# Altium PCB Copy of MB1189.PcbDoc (part 3 of 3)
Units mm, origin at the board's own origin, x right, y up, seen from the top; angles counter-clockwise.
Board outline 60.03 x 127.03 mm, 6 copper layers (TOP, L2_GND, L3_VCC, L4_SIG, L5_GND, BOTTOM), stack 1.58 mm thick; 10 components, 264 nets, 52 pads, 0 vias.
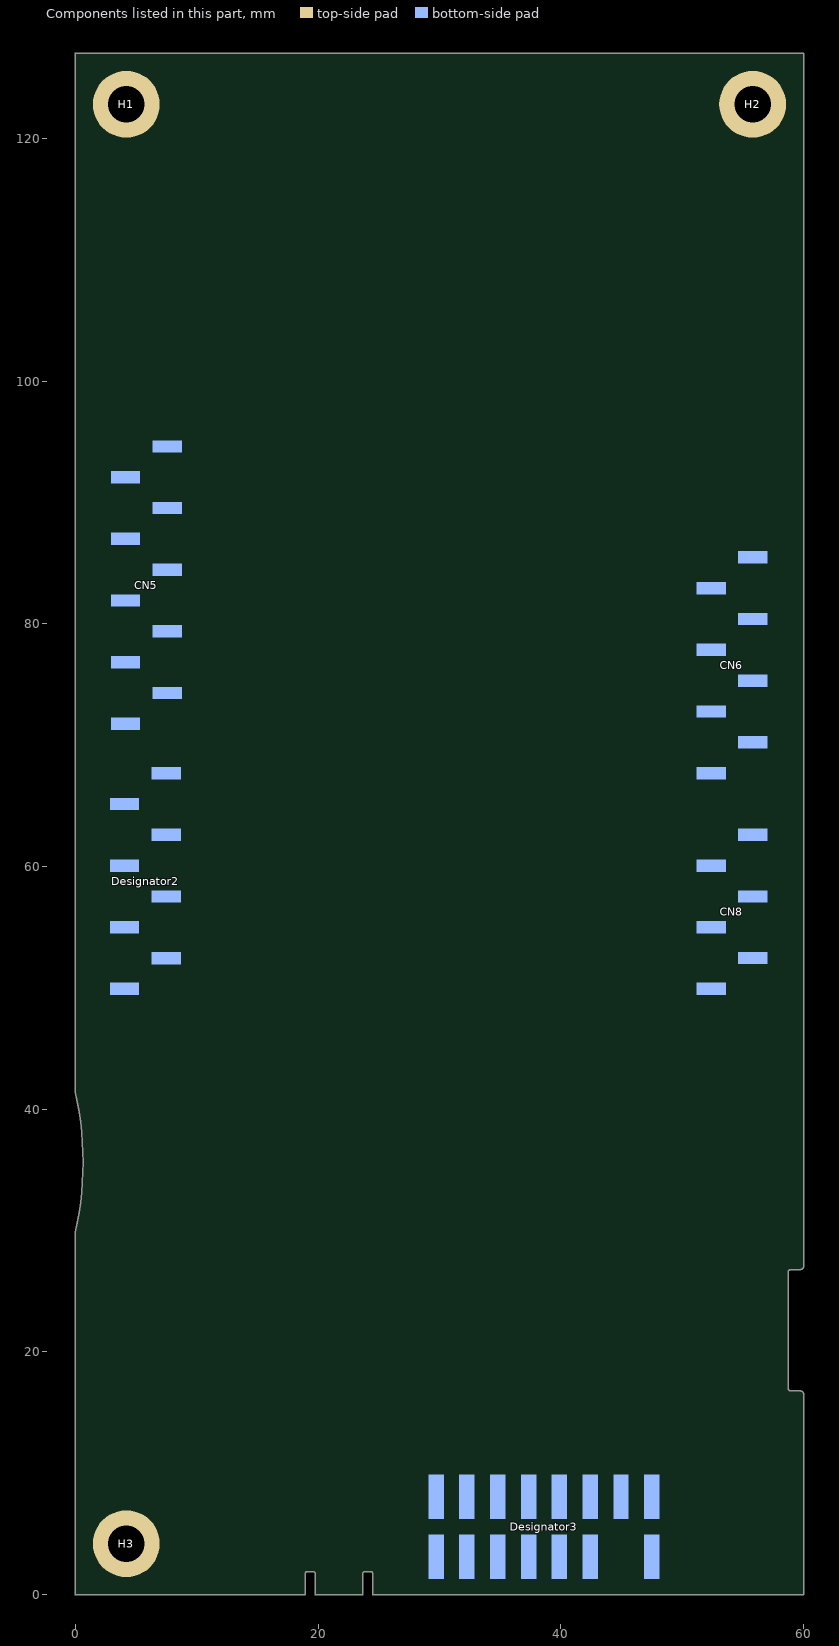
[diagram p7: the components of this part, seen from the top]

## Other copper (continued)
L3_VCC (plane layer: these items are gaps in the copper):
  region: 16.777,62.23 25.401,62.23 25.655,61.976 25.655,60.452 25.506,60.303 25.655,60.155 25.655,58.42 25.527,58.292 16.777,58.292 16.777,58.42 18.377,58.42 18.377,60.071 16.777,60.071 16.777,60.452 18.377,60.452 18.377,62.103 16.777,62.103
  region: 16.777,62.23 11.261,62.23 11.134,62.103 11.134,60.528 11.405,60.258 11.175,60.028 11.175,58.547 11.43,58.292 16.777,58.292
  pour cut-out: 10.015,38.792 9.989,38.984 9.915,39.164 9.797,39.318 9.643,39.436 9.463,39.51 9.271,39.536 9.079,39.51 8.899,39.436 8.745,39.318 8.627,39.164 8.553,38.984 8.527,38.792 8.553,38.599 8.627,38.42 8.745,38.266 8.899,38.148 9.079,38.074 9.271,38.048 9.463,38.074 9.643,38.148 9.797,38.266 9.915,38.42 9.989,38.599 10.015,38.792
  pour cut-out: 10.015,31.242 9.989,31.434 9.915,31.614 9.797,31.768 9.643,31.886 9.463,31.96 9.271,31.986 9.079,31.96 8.899,31.886 8.745,31.768 8.627,31.614 8.553,31.434 8.527,31.242 8.553,31.05 8.627,30.87 8.745,30.716 8.899,30.598 9.079,30.524 9.271,30.498 9.463,30.524 9.643,30.598 9.797,30.716 9.915,30.87 9.989,31.05 10.015,31.242
  pour cut-out: 13.346,102.108 13.298,102.468 13.159,102.804 12.938,103.093 12.649,103.314 12.313,103.453 11.953,103.501 11.593,103.453 11.257,103.314 10.968,103.093 10.747,102.804 10.608,102.468 10.56,102.108 10.608,101.748 10.747,101.412 10.968,101.123 11.257,100.902 11.593,100.763 11.953,100.715 12.313,100.763 12.649,100.902 12.938,101.123 13.159,101.412 13.298,101.748 13.346,102.108
  pour cut-out: 6.346,102.108 6.298,102.468 6.159,102.804 5.938,103.093 5.649,103.314 5.313,103.453 4.953,103.501 4.593,103.453 4.257,103.314 3.968,103.093 3.747,102.804 3.608,102.468 3.56,102.108 3.608,101.748 3.747,101.412 3.968,101.123 4.257,100.902 4.593,100.763 4.953,100.715 5.313,100.763 5.649,100.902 5.938,101.123 6.159,101.412 6.298,101.748 6.346,102.108
  pour cut-out: 8.629,21.59 8.595,21.851 8.494,22.095 8.334,22.304 8.125,22.464 7.881,22.565 7.62,22.599 7.359,22.565 7.115,22.464 6.906,22.304 6.746,22.095 6.645,21.851 6.611,21.59 6.645,21.329 6.746,21.085 6.906,20.876 7.115,20.716 7.359,20.615 7.62,20.581 7.881,20.615 8.125,20.716 8.334,20.876 8.494,21.085 8.595,21.329 8.629,21.59
  pour cut-out: 8.629,16.51 8.595,16.771 8.494,17.015 8.334,17.224 8.125,17.384 7.881,17.485 7.62,17.519 7.359,17.485 7.115,17.384 6.906,17.224 6.746,17.015 6.645,16.771 6.611,16.51 6.645,16.249 6.746,16.005 6.906,15.796 7.115,15.636 7.359,15.535 7.62,15.501 7.881,15.535 8.125,15.636 8.334,15.796 8.494,16.005 8.595,16.249 8.629,16.51
  pour cut-out: 30.027,122.151 29.996,122.386 29.905,122.605 29.76,122.793 29.572,122.938 29.353,123.028 29.118,123.059 28.883,123.028 28.664,122.938 28.476,122.793 28.331,122.605 28.241,122.386 28.21,122.151 28.241,121.916 28.331,121.697 28.476,121.509 28.664,121.364 28.883,121.273 29.118,121.242 29.353,121.273 29.572,121.364 29.76,121.509 29.905,121.697 29.996,121.916 30.027,122.151
  pour cut-out: 34.427,122.151 34.396,122.386 34.305,122.605 34.16,122.793 33.972,122.938 33.753,123.028 33.518,123.059 33.283,123.028 33.064,122.938 32.876,122.793 32.731,122.605 32.641,122.386 32.61,122.151 32.641,121.916 32.731,121.697 32.876,121.509 33.064,121.364 33.283,121.273 33.518,121.242 33.753,121.273 33.972,121.364 34.16,121.509 34.305,121.697 34.396,121.916 34.427,122.151
  lines w0.254: 9.134,4.804 9.134,16.786 ; 9.134,4.804 9.134,4.804 ; 9.134,4.804 9.162,4.735 9.174,4.707 ; 9.134,16.786 9.174,16.883 12.817,20.526 12.817,28.851 ; 9.134,16.786 9.134,16.786 ; 9.174,4.707 9.174,4.707 ; 9.174,4.707 9.533,4.348 9.63,4.308 ; 9.63,4.308 9.63,4.308 ; 9.63,4.308 13.484,4.308 13.581,4.348 ; 12.817,28.851 12.857,28.948 14.359,30.45 14.456,30.49 ; 12.817,28.851 12.817,28.851 ; 13.581,4.348 13.581,4.348 ; 13.581,4.348 14.067,4.834 14.107,4.931 ; 14.107,4.931 14.107,4.931 ; 14.107,4.931 14.107,13.002 18.748,17.643 27.962,17.643 ; 14.341,12.849 14.381,12.946 18.804,17.369 ; 14.341,12.849 14.341,12.849 ; 14.341,12.849 14.341,9.017 14.381,8.92 14.478,8.88 16.405,8.88 16.502,8.92 17.224,9.642 26.819,9.642 26.916,9.682 ; 14.456,30.49 17.701,30.49 18.786,31.575 18.786,53.721 ; 14.456,30.49 14.456,30.49 ; 16.754,103.991 16.754,110.512 ; 16.754,103.991 16.754,103.991 ; 16.754,103.991 16.794,103.894 18.786,101.902 18.786,65.637 18.826,65.54 ; 16.754,110.512 16.794,110.609 25.916,119.731 ; 16.754,110.512 16.754,110.512 ; 18.766,0.412 18.669,0.372 0.509,0.372 0.412,0.412 0.372,0.509 0.372,29.667 0.377,29.68 0.374,29.694 0.905,32.378 1.056,34.499 1.082,35.912 0.93,38.062 0.728,39.906 0.375,41.499 0.378,41.515 0.372,41.529 0.372,126.491 0.412,126.588 0.509,126.628 59.491,126.628 59.588,126.588 59.628,126.491 59.628,27.306 59.588,27.209 59.491,27.168 58.97,27.168 58.913,27.166 58.859,27.159 58.805,27.147 58.753,27.13 58.703,27.11 58.654,27.084 58.608,27.055 58.565,27.022 58.525,26.985 58.488,26.945 58.455,26.901 58.425,26.855 58.4,26.807 58.379,26.757 58.363,26.705 58.351,26.651 58.344,26.597 58.342,26.54 58.342,17.021 58.344,16.963 58.351,16.909 58.363,16.856 58.379,16.804 58.4,16.753 58.425,16.705 58.455,16.659 58.488,16.616 58.525,16.576 58.565,16.539 58.608,16.505 58.654,16.476 58.703,16.451 58.753,16.43 58.805,16.414 58.859,16.402 58.913,16.395 58.97,16.392 59.491,16.392 59.588,16.352 59.628,16.255 59.628,0.509 59.588,0.412 59.491,0.372 24.714,0.372 ; 18.766,0.412 18.766,0.412 ; 18.766,0.412 18.817,0.463 18.857,0.56 ; 18.786,53.721 18.826,53.818 19.408,54.401 ; 18.786,53.721 18.786,53.721 ; 18.804,17.369 18.901,17.409 28.115,17.409 30.996,20.29 ; 18.804,17.369 18.804,17.369 ; 18.826,65.54 18.826,65.54 ; 18.826,65.54 22.106,62.26 22.203,62.22 ; 18.857,0.56 18.857,0.56 ; 18.857,0.56 18.857,2.022 19.882,2.022 19.903,2 19.903,0.509 19.943,0.412 20.041,0.372 23.393,0.372 23.491,0.412 ; 19.408,54.401 19.505,54.441 25.707,54.441 ; 19.408,54.401 19.408,54.401 ; 22.203,62.22 22.203,62.22 ; 22.203,62.22 41.275,62.22 41.372,62.26 41.412,62.357 41.412,83.461 41.372,83.558 ; 23.491,0.412 23.491,0.412 ; 23.491,0.412 23.541,0.463 23.582,0.56 ; 23.582,0.56 23.582,0.56 ; 23.582,0.56 23.582,1.95 23.603,1.971 24.454,1.971 24.526,1.899 24.526,0.559 24.566,0.462 24.568,0.461 24.617,0.412 24.714,0.372 ; 24.714,0.372 24.714,0.372 ; 25.707,54.441 25.804,54.401 26.513,53.691 26.553,53.594 ; 25.707,54.441 25.707,54.441 ; 25.898,82.274 25.898,89.303 ; 25.898,82.274 25.898,82.274 ; 25.898,82.274 25.938,82.177 26.678,81.437 26.775,81.397 ; 25.898,89.303 25.938,89.4 34.661,98.123 34.661,115.618 34.338,115.941 31.601,115.941 ; 25.898,89.303 25.898,89.303 ; 25.916,119.731 25.944,119.743 26.013,119.771 ; 25.916,119.731 25.916,119.731 ; 26.013,119.771 26.013,119.771 ; 26.013,119.771 30.353,119.771 30.45,119.731 30.49,119.634 30.49,116.665 31.448,115.707 34.185,115.707 ; 26.553,53.594 26.553,43.767 27.13,43.19 46.355,43.19 46.452,43.15 46.492,43.053 46.492,39.602 ; 26.553,53.594 26.553,53.594 ; 26.775,81.397 26.775,81.397 ; 26.775,81.397 31.899,81.397 ; 26.916,9.682 26.916,9.682 ; 26.916,9.682 27.402,10.168 27.442,10.265 ; 27.442,10.265 27.442,10.265 ; 27.442,10.265 27.442,11.859 28.908,13.325 30.883,13.325 ; 27.962,17.643 27.962,17.643 ; 27.962,17.643 28.031,17.671 28.059,17.683 ; 28.059,17.683 28.059,17.683 ; 28.059,17.683 30.94,20.564 42.948,20.564 ; 30.724,116.818 30.724,119.634 30.764,119.731 30.861,119.771 51.965,119.771 ; 30.724,116.818 30.724,116.818 ; 30.724,116.818 30.764,116.721 31.504,115.981 31.601,115.941 ; 30.883,13.325 30.883,13.325 ; 30.883,13.325 30.98,13.365 33.353,15.738 46.758,15.738 ; 30.996,20.29 31.024,20.302 31.093,20.33 ; 30.996,20.29 30.996,20.29 ; 31.093,20.33 43.101,20.33 44.821,22.05 44.821,37.487 ; 31.093,20.33 31.093,20.33 ; 31.601,115.941 31.601,115.941 ; 31.899,81.397 31.899,81.397 ; 31.899,81.397 31.968,81.425 31.996,81.437 ; 31.996,81.437 31.996,81.437 ; 31.996,81.437 32.355,81.796 32.395,81.893 ; 32.395,81.893 32.395,81.893 ; 32.395,81.893 32.395,85.646 33.099,86.35 38.91,86.35 41.646,83.614 41.646,62.357 41.686,62.26 41.783,62.22 45.641,62.22 46.726,61.135 46.726,39.449 44.861,37.584 44.821,37.487 ; 32.629,85.493 32.669,85.59 33.155,86.076 ; 32.629,85.493 32.629,85.493 ; 32.629,85.493 32.629,81.74 32.052,81.163 26.622,81.163 25.664,82.121 25.664,89.456 34.387,98.179 34.427,98.276 ; 33.155,86.076 33.252,86.116 38.757,86.116 ; 33.155,86.076 33.155,86.076 ; 34.185,115.707 34.282,115.667 34.387,115.562 ; 34.185,115.707 34.185,115.707 ; 34.387,115.562 34.427,115.465 34.427,98.276 ; 34.387,115.562 34.387,115.562 ; 34.427,98.276 34.427,98.276 ; 38.757,86.116 38.854,86.076 41.372,83.558 ; 38.757,86.116 38.757,86.116 ; 41.372,83.558 41.372,83.558 ; 42.948,20.564 42.948,20.564 ; 42.948,20.564 43.045,20.604 44.547,22.106 44.587,22.203 ; 44.587,22.203 44.587,22.203 ; 44.587,22.203 44.587,37.64 46.452,39.505 46.492,39.602 ; 44.821,37.487 44.821,37.487 ; 46.492,39.602 46.492,39.602 ; 46.758,15.738 46.758,15.738 ; 46.758,15.738 46.827,15.766 46.855,15.778 ; 46.855,15.778 46.855,15.778 ; 46.855,15.778 49.627,18.55 49.667,18.647 ; 49.667,18.647 49.667,18.647 ; 49.667,18.647 49.667,34.973 52.167,37.473 52.207,37.57 ; 50.77,73.144 50.782,73.116 50.81,73.047 ; 50.77,73.144 50.77,73.144 ; 50.77,73.144 49.54,74.374 49.54,87.805 52.421,90.686 52.461,90.783 ; 50.81,73.047 50.81,66.627 52.167,65.27 ; 50.81,73.047 50.81,73.047 ; 51.965,119.771 52.062,119.731 55.85,115.943 55.89,115.846 55.89,96.012 55.85,95.915 55.753,95.875 54.816,95.875 52.461,93.52 52.461,90.783 ; 51.965,119.771 51.965,119.771 ; 52.167,65.27 52.207,65.173 52.207,37.57 ; 52.167,65.27 52.167,65.27 ; 52.207,37.57 52.207,37.57 ; 52.461,90.783 52.461,90.783
  lines w0.508: 30.607,119.888 30.607,116.713 31.496,115.824 34.29,115.824 34.544,115.57 34.544,98.171 25.781,89.408 25.781,82.169 26.67,81.28 32.004,81.28 32.512,81.788 32.512,85.598 33.147,86.233 38.862,86.233 41.529,83.566 41.529,61.976 ; 42.672,15.621 46.863,15.621 49.784,18.542 49.784,34.925 52.324,37.465 52.324,65.278 50.927,66.675 50.927,73.152 49.657,74.422 49.657,87.757 52.578,90.678 52.578,93.472 54.864,95.758 56.007,95.758 56.007,115.951 52.07,119.888 25.908,119.888 16.637,110.617 16.637,103.886 18.669,101.854 18.669,65.532 22.098,62.103 45.593,62.103 46.609,61.087 46.609,43.561 ; 42.799,15.621 33.401,15.621 30.988,13.208 28.956,13.208 27.559,11.811 27.559,10.16 26.924,9.525 17.272,9.525 16.51,8.763 ; 14.224,8.763 16.51,8.763 ; 14.224,8.763 14.224,4.826 13.589,4.191 9.525,4.191 9.017,4.699 9.017,16.891 12.7,20.574 12.7,28.956 14.351,30.607 17.653,30.607 18.669,31.623 18.669,53.848 19.431,54.61 25.781,54.61 26.67,53.721 26.67,43.815 27.178,43.307 46.355,43.307 46.609,43.561 ; 14.224,8.763 16.51,8.763 ; 14.224,8.763 14.224,12.954 18.796,17.526 28.067,17.526 30.988,20.447 43.053,20.447 44.704,22.098 44.704,37.592 46.609,39.497 46.609,43.561
  text "3" at 17.259,60.82 h1.4
  text "B" at 17.259,58.801 h1.4
  text "L3 VCC" at 55.42,-49.21 h1.52
  text ".GP2" at 97.5,-49.2 h1.52
  text "3" at 65.1,-49.26 h1.91
L5_GND (plane layer: these items are gaps in the copper):
  region: 20.327,62.23 25.401,62.23 25.655,61.976 25.655,60.452 25.506,60.303 25.655,60.155 25.655,58.42 25.527,58.292 20.327,58.292 20.327,58.42 21.971,58.42 21.971,60.071 20.327,60.071 20.327,60.452 21.971,60.452 21.971,62.103 20.327,62.103
  region: 20.327,62.23 11.261,62.23 11.134,62.103 11.134,60.528 11.405,60.258 11.175,60.028 11.175,58.547 11.43,58.292 20.327,58.292
  pour cut-out: 52.508,116.044 52.508,97.027 33.491,97.027 33.491,116.044 52.508,116.044
  pour cut-out: 34.427,122.151 34.396,122.386 34.305,122.605 34.16,122.793 33.972,122.938 33.753,123.028 33.518,123.059 33.283,123.028 33.064,122.938 32.876,122.793 32.731,122.605 32.641,122.386 32.61,122.151 32.641,121.916 32.731,121.697 32.876,121.509 33.064,121.364 33.283,121.273 33.518,121.242 33.753,121.273 33.972,121.364 34.16,121.509 34.305,121.697 34.396,121.916 34.427,122.151
  pour cut-out: 30.027,122.151 29.996,122.386 29.905,122.605 29.76,122.793 29.572,122.938 29.353,123.028 29.118,123.059 28.883,123.028 28.664,122.938 28.476,122.793 28.331,122.605 28.241,122.386 28.21,122.151 28.241,121.916 28.331,121.697 28.476,121.509 28.664,121.364 28.883,121.273 29.118,121.242 29.353,121.273 29.572,121.364 29.76,121.509 29.905,121.697 29.996,121.916 30.027,122.151
  pour cut-out: 8.629,16.51 8.595,16.771 8.494,17.015 8.334,17.224 8.125,17.384 7.881,17.485 7.62,17.519 7.359,17.485 7.115,17.384 6.906,17.224 6.746,17.015 6.645,16.771 6.611,16.51 6.645,16.249 6.746,16.005 6.906,15.796 7.115,15.636 7.359,15.535 7.62,15.501 7.881,15.535 8.125,15.636 8.334,15.796 8.494,16.005 8.595,16.249 8.629,16.51
  pour cut-out: 8.629,21.59 8.595,21.851 8.494,22.095 8.334,22.304 8.125,22.464 7.881,22.565 7.62,22.599 7.359,22.565 7.115,22.464 6.906,22.304 6.746,22.095 6.645,21.851 6.611,21.59 6.645,21.329 6.746,21.085 6.906,20.876 7.115,20.716 7.359,20.615 7.62,20.581 7.881,20.615 8.125,20.716 8.334,20.876 8.494,21.085 8.595,21.329 8.629,21.59
  pour cut-out: 6.346,102.108 6.298,102.468 6.159,102.804 5.938,103.093 5.649,103.314 5.313,103.453 4.953,103.501 4.593,103.453 4.257,103.314 3.968,103.093 3.747,102.804 3.608,102.468 3.56,102.108 3.608,101.748 3.747,101.412 3.968,101.123 4.257,100.902 4.593,100.763 4.953,100.715 5.313,100.763 5.649,100.902 5.938,101.123 6.159,101.412 6.298,101.748 6.346,102.108
  pour cut-out: 10.015,31.242 9.989,31.434 9.915,31.614 9.797,31.768 9.643,31.886 9.463,31.96 9.271,31.986 9.079,31.96 8.899,31.886 8.745,31.768 8.627,31.614 8.553,31.434 8.527,31.242 8.553,31.05 8.627,30.87 8.745,30.716 8.899,30.598 9.079,30.524 9.271,30.498 9.463,30.524 9.643,30.598 9.797,30.716 9.915,30.87 9.989,31.05 10.015,31.242
  pour cut-out: 10.015,38.792 9.989,38.984 9.915,39.164 9.797,39.318 9.643,39.436 9.463,39.51 9.271,39.536 9.079,39.51 8.899,39.436 8.745,39.318 8.627,39.164 8.553,38.984 8.527,38.792 8.553,38.599 8.627,38.42 8.745,38.266 8.899,38.148 9.079,38.074 9.271,38.048 9.463,38.074 9.643,38.148 9.797,38.266 9.915,38.42 9.989,38.599 10.015,38.792
  pour cut-out: 13.346,102.108 13.298,102.468 13.159,102.804 12.938,103.093 12.649,103.314 12.313,103.453 11.953,103.501 11.593,103.453 11.257,103.314 10.968,103.093 10.747,102.804 10.608,102.468 10.56,102.108 10.608,101.748 10.747,101.412 10.968,101.123 11.257,100.902 11.593,100.763 11.953,100.715 12.313,100.763 12.649,100.902 12.938,101.123 13.159,101.412 13.298,101.748 13.346,102.108
  lines w0.254: 18.766,0.411 18.669,0.371 0.508,0.371 0.411,0.411 0.371,0.508 0.371,29.515 0.376,29.529 0.374,29.544 0.551,30.356 0.88,31.999 0.98,33.029 1.031,34.572 1.031,37.533 0.779,39.525 0.425,41.244 0.375,41.445 0.377,41.462 0.371,41.478 0.371,126.492 0.411,126.589 0.508,126.629 59.492,126.629 59.589,126.589 59.629,126.492 59.629,27.305 59.589,27.208 59.492,27.167 58.97,27.167 58.913,27.165 58.859,27.158 58.806,27.146 58.754,27.129 58.703,27.109 58.655,27.083 58.609,27.054 58.566,27.021 58.526,26.984 58.489,26.944 58.456,26.901 58.426,26.855 58.401,26.807 58.38,26.756 58.364,26.704 58.352,26.651 58.345,26.597 58.343,26.54 58.343,17.021 58.345,16.963 58.352,16.909 58.364,16.856 58.38,16.804 58.401,16.754 58.426,16.706 58.456,16.66 58.489,16.616 58.526,16.576 58.566,16.539 58.609,16.506 58.655,16.477 58.703,16.452 58.754,16.431 58.806,16.415 58.859,16.403 58.913,16.396 58.97,16.393 59.492,16.393 59.589,16.353 59.629,16.256 59.629,0.508 59.589,0.411 59.492,0.371 24.74,0.371 ; 18.766,0.411 18.766,0.411 ; 18.766,0.411 18.842,0.487 18.883,0.584 ; 18.883,0.584 18.883,0.584 ; 18.883,0.584 18.883,2.022 19.857,2.022 19.878,2 19.878,0.61 ; 19.878,0.61 19.878,0.61 ; 19.878,0.61 19.906,0.541 19.918,0.512 ; 19.918,0.512 19.918,0.512 ; 19.918,0.512 20.02,0.411 20.117,0.371 ; 20.117,0.371 20.117,0.371 ; 20.117,0.371 23.368,0.371 23.465,0.411 ; 23.465,0.411 23.465,0.411 ; 23.465,0.411 23.541,0.487 23.582,0.584 ; 23.582,0.584 23.582,0.584 ; 23.582,0.584 23.582,1.924 23.603,1.945 24.479,1.945 24.526,1.899 24.526,0.584 24.566,0.487 ; 24.566,0.487 24.566,0.487 ; 24.566,0.487 24.642,0.411 24.74,0.371 ; 24.74,0.371 24.74,0.371
  text "5" at 21.476,60.833 h1.4
  text "B" at 21.463,58.801 h1.4
  text "5" at 65.4,-49.21 h1.91
  text "L5 GND" at 55.62,-49.31 h1.52
  text ".GP3" at 97.59,-49.29 h1.52

## Silkscreen, mask and mechanical layers (free items; w line width, h text height)
Top Overlay:
  lines w0.2: 10.795,122.834 10.541,122.834 10.541,121.793 11.659,121.793 11.659,122.047 ; 26.797,4.851 26.543,4.851 26.543,3.81 27.661,3.81 27.661,4.064 ; 47.799,4.851 47.545,4.851 47.545,3.81 48.663,3.81 48.663,4.064 ; 0,-0.042 0,29.804 ; 0,-0.042 18.917,-0.042 ; 0,-0.042 18.917,-0.042 ; 0,-0.042 0,29.804 ; 0,29.804 ccw(c-25.59,35.582) 0,41.361 ; 0,41.361 0,126.958 ; 0,41.361 0,126.958 ; 0,126.958 60,126.958 ; 0,126.958 60,126.958 ; 18.917,-0.042 18.917,1.744 ; 18.917,-0.042 18.917,1.744 ; 18.917,1.744 19.017,1.844 ; 18.917,1.744 19.017,1.844 ; 19.017,1.844 19.667,1.844 ; 19.017,1.844 19.667,1.844 ; 19.667,1.844 19.767,1.744 ; 19.667,1.844 19.767,1.744 ; 19.767,-0.042 19.767,1.744 ; 19.767,-0.042 23.667,-0.042 ; 19.767,-0.042 23.667,-0.042 ; 19.767,-0.042 19.767,1.744 ; 23.667,-0.042 23.667,1.744 ; 23.667,-0.042 23.667,1.744 ; 23.667,1.744 23.767,1.844 ; 23.667,1.744 23.767,1.844 ; 23.767,1.844 24.417,1.844 ; 23.767,1.844 24.417,1.844 ; 24.417,1.844 24.517,1.744 ; 24.417,1.844 24.517,1.744 ; 24.517,-0.042 24.517,1.744 ; 24.517,-0.042 60,-0.042 ; 24.517,-0.042 60,-0.042 ; 24.517,-0.042 24.517,1.744 ; 58.713,16.976 ccw(c58.967,16.976) 58.967,16.722 ; 58.713,16.976 ccw(c58.967,16.976) 58.967,16.722 ; 58.713,16.976 58.713,26.501 ; 58.713,16.976 58.713,26.501 ; 58.713,26.501 cw(c58.967,26.501) 58.967,26.755 ; 58.713,26.501 cw(c58.967,26.501) 58.967,26.755 ; 58.967,16.722 59.746,16.722 ; 58.967,16.722 59.746,16.722 ; 58.967,26.755 59.746,26.755 ; 58.967,26.755 59.746,26.755 ; 59.746,16.722 cw(c59.746,16.468) 60,16.468 ; 59.746,16.722 cw(c59.746,16.468) 60,16.468 ; 59.746,26.755 ccw(c59.746,27.009) 60,27.009 ; 59.746,26.755 ccw(c59.746,27.009) 60,27.009 ; 60,-0.042 60,16.468 ; 60,-0.042 60,16.468 ; 60,27.009 60,126.958 ; 60,27.009 60,126.958 ; 0.26,10.027 60,10.027 60,116.957 0.26,116.957 0.26,10.027 ; 11.43,58.547 11.43,59.944 12.827,59.944 12.827,58.547 11.43,58.547 ; 11.43,60.579 11.43,61.976 12.827,61.976 12.827,60.579 11.43,60.579 ; 21.336,5.8 22.479,5.8 22.479,9.356 21.336,9.356 21.336,5.8 ; 34,97.495 52,97.495 52,115.495 34,115.495 34,97.495
  text "H" at 46.68,121.512 h10
  text "J" at 35.56,118.738 h16
  text "C" at 47.735,118.601 h5
  text "www.st.com/stm32f4-discovery" at 12.99,117.92 h2.3
  text "S" at 11.752,60.762 h2
  text "B" at 11.705,58.712 h2
  text "MB1189C" at 9.11,7.87 h2.5
  text "STM32F469I-DISCO" at 29.93,7.85 h2.6
  text "VBUS" at 22.358,5.891 h1.4 r90
  text "E" at 34.305,4.754 h5
  text "F" at 38.98,4.25 h5
  text "I" at 14.38,3.17 h5
  text "G" at 8.59,3.144 h5
  text "S" at 36.36,0.48 h5
  text "TOP SILKSCREEN" at 55.499,-49.276 h1.52
  text ".GTO" at 97.5,-49.47 h1.52
Bottom Overlay:
  drawing of 324 lines, arcs and shapes, not listed
  text "RESET" at 18.662,125.652 h2
  text "GND" at 10.332,124.465 h1.7
  text "E5V" at 52.204,124.369 h2
  text "STLK" at 52.668,121.602 h2
  text "USBST-LINK" at 37.242,118.583 h2 r270
  text "USB" at 52.177,118.342 h2
  text "USER" at 4.666,117.082 h2
  text "5V" at 49.923,116.029 h2
  text "COM" at 58.761,113.577 h1.7 r270
  text "A" at 20.145,99.311 h1.7
  text "TS" at 59.514,98.602 h2
  text "AUDIO JACK" at 15.829,97.717 h2
  text "AUDIO JACK" at 15.829,97.717 h2
  text "D15" at 2.152,94.309 h1.6
  text "D14" at 1.945,91.941 h1.5
  text "A" at 49.982,89.434 h2
  text "AVDD" at 3.307,89.12 h1.6
  text "GND" at 2.578,86.58 h1.6
  text "D13" at 2.158,84.055 h1.6
  text "IOREF5" at 59.777,82.504 h1.7
  text "D12" at 2.161,81.508 h1.6
  text "NRST" at 59.845,79.976 h1.6
  text "D11" at 2.152,79.058 h1.6
  text "3V3" at 59.656,77.31 h1.6
  text "D10" at 2.179,76.421 h1.6
  text "5V" at 59.642,74.911 h1.6
  text "D9" at 1.499,74.015 h1.6
  text "GND" at 59.825,72.356 h1.6
  text "D8" at 1.508,71.221 h1.6
  text "GND" at 59.907,69.9 h1.6
  text "VIN" at 59.845,67.404 h1.6
  text "D7" at 1.496,67.166 h1.6
  text "B" at 10.555,65.002 h2
  text "D6" at 1.508,64.615 h1.6
  text "D5" at 1.487,62.338 h1.6
  text "A0" at 59.749,62.206 h1.6
  text "B" at 24.994,60.833 h1.5
  text "A1" at 59.749,59.894 h1.6
  text "D4" at 1.523,59.774 h1.6
  text "B" at 24.994,58.801 h1.5
  text "D3" at 1.493,57.164 h1.6
  text "A2" at 59.749,57.089 h1.6
  text "A3" at 59.749,54.696 h1.6
  text "D2" at 1.496,54.597 h1.6
  text "D1" at 1.487,52.201 h1.6
  text "A4" at 59.749,52.167 h1.6
  text "D0" at 1.514,49.495 h1.6
  text "A5" at 59.741,49.511 h1.6
  text "uSB" at 8.94,42.982 h2
  text "B" at 17.395,42.522 h2
  text "C" at 27.033,27.552 h2
  text "RFEEPROM" at 7.832,24.624 h1.8
  text "C" at 15.002,23.784 h2
  text "DSI  LCD" at 57.082,18.298 h2 r270
  text "FAULT" at 7.421,7.825 h1.9
  text "EXT" at 51.695,5.142 h2
  text "IDD" at 8.966,0.812 h2
  text "USB USER" at 26.992,0.567 h2 r270
  text ".GBO" at -7.9,-49.12 h1.8
  text "BOTTOM SILKSCREEN" at 27.457,-49.276 h1.8
Top Paste:
  text "SOLDER PASTE (PRIMARY)" at 55.499,-49.276 h1.52
Bottom Paste:
  text "BOTTOM SOLDER PASTE" at 55.499,-49.276 h1.52
Top Solder:
  text "TOP SOLDER MASK" at 55.499,-49.276 h1.52
  text ".GTS" at 97.47,-49.36 h1.52
Bottom Solder:
  text "BOTTOM SOLDER MASK" at 55.499,-49.276 h1.52
  text ".GBS" at 97.33,-49.29 h1.52
OUTLINE:
  lines w0.025: 0,29.845 0,0 18.917,0 18.917,1.785 19.017,1.885 19.667,1.885 19.767,1.785 19.767,0 23.667,0 23.667,1.785 23.767,1.885 24.417,1.885 24.517,1.785 24.517,0 60,0 60,16.51 ccw(c59.746,16.51) 59.746,16.764 58.967,16.764 cw(c58.967,17.018) 58.713,17.018 58.713,26.543 cw(c58.967,26.543) 58.967,26.797 ; 0,29.845 ccw(c-25.59,35.623) 0,41.402 ; -90.424,-128.016 -90.424,283.464 ; -90.424,-128.016 458.216,-128.016 ; -90.424,-128.016 -90.424,283.464 ; -90.424,-128.016 458.216,-128.016 ; -90.424,283.464 458.216,283.464 ; -90.424,283.464 458.216,283.464 ; -82.804,-120.396 326.136,-120.396 ; -82.804,-120.396 -82.804,275.844 ; -82.804,-120.396 -82.804,275.844 ; -82.804,-120.396 326.136,-120.396 ; -82.804,275.844 450.596,275.844 ; -82.804,275.844 450.596,275.844 ; 0,127 0,41.402 0,127 ; 0,127 60,127 ; 0,127 60,127 ; 58.967,26.797 59.746,26.797 ; 58.967,26.797 59.746,26.797 ; 59.746,26.797 ccw(c59.746,27.051) 60,27.051 ; 60,27.051 60,127 ; 60,27.051 60,127 ; 178.816,-116.586 188.976,-116.586 ; 178.816,-116.586 183.896,-128.016 ; 178.816,-116.586 183.896,-121.666 ; 178.816,-116.586 183.896,-121.666 ; 178.816,-116.586 188.976,-116.586 ; 178.816,-116.586 183.896,-128.016 ; 183.896,-128.016 188.976,-116.586 ; 183.896,-128.016 183.896,-110.236 183.896,-128.016 ; 183.896,-128.016 183.896,-120.396 183.896,-128.016 ; 183.896,-128.016 188.976,-116.586 ; 183.896,-121.666 188.976,-116.586 ; 183.896,-121.666 188.976,-116.586 ; 326.136,-120.396 450.596,-120.396 ; 326.136,-120.396 450.596,-120.396 ; 450.596,-120.396 450.596,123.444 ; 450.596,-120.396 450.596,123.444 ; 450.596,123.444 450.596,219.964 450.596,123.444 ; 450.596,275.844 450.596,82.804 450.596,275.844 ; 458.216,-128.016 458.216,283.464 ; 458.216,-128.016 458.216,283.464 ; -90.424,-21.336 -82.804,-21.336 -90.424,-21.336 ; -90.424,77.724 -82.804,77.724 -90.424,77.724 ; -90.424,176.784 -82.804,176.784 -90.424,176.784 ; 6.096,-128.016 6.096,-120.396 6.096,-128.016 ; 6.096,275.844 6.096,283.464 6.096,275.844 ; 94.996,-128.016 94.996,-120.396 94.996,-128.016 ; 94.996,275.844 94.996,283.464 94.996,275.844 ; 183.896,275.844 183.896,283.464 183.896,275.844 ; 272.796,-128.016 272.796,-120.396 272.796,-128.016 ; 272.796,275.844 272.796,283.464 272.796,275.844 ; 361.696,-128.016 361.696,-120.396 361.696,-128.016 ; 361.696,275.844 361.696,283.464 361.696,275.844 ; 450.596,-21.336 458.216,-21.336 450.596,-21.336 ; 450.596,77.724 458.216,77.724 450.596,77.724 ; 450.596,176.784 458.216,176.784 450.596,176.784
  text "6" at -37.084,278.384 h3.3
  text "6" at -37.084,278.384 h3.3
  text "5" at 51.816,278.384 h3.3
  text "5" at 51.816,278.384 h3.3
  text "4" at 140.716,278.384 h3.3
  text "4" at 140.716,278.384 h3.3
  text "3" at 229.616,278.384 h3.3
  text "3" at 229.616,278.384 h3.3
  text "2" at 318.516,278.384 h3.3
  text "2" at 318.516,278.384 h3.3
  text "1" at 407.416,278.384 h3.3
  text "1" at 407.416,278.384 h3.3
  text "D" at -87.884,219.964 h3.3
  text "D" at -87.884,219.964 h3.3
  text "D" at 453.136,219.964 h3.3
  text "D" at 453.136,219.964 h3.3
  text "C" at -87.884,120.904 h3.3
  text "C" at -87.884,120.904 h3.3
  text "C" at 453.136,120.904 h3.3
  text "C" at 453.136,120.904 h3.3
  text "B" at -87.884,26.924 h3.3
  text "B" at -87.884,26.924 h3.3
  text "B" at 453.136,26.924 h3.3
  text "B" at 453.136,26.924 h3.3
  text "A" at -87.884,-79.756 h3.3
  text "A" at -87.884,-79.756 h3.3
  text "A" at 453.136,-79.756 h3.3
  text "A" at 453.136,-79.756 h3.3
  text "6" at -37.084,-125.476 h3.3
  text "6" at -37.084,-125.476 h3.3
  text "5" at 51.816,-125.476 h3.3
  text "5" at 51.816,-125.476 h3.3
  text "4" at 140.716,-125.476 h3.3
  text "4" at 140.716,-125.476 h3.3
  text "3" at 229.616,-125.476 h3.3
  text "3" at 229.616,-125.476 h3.3
  text "2" at 318.516,-125.476 h3.3
  text "2" at 318.516,-125.476 h3.3
  text "1" at 407.416,-125.476 h3.3
  text "1" at 407.416,-125.476 h3.3
DIMENSION:
  lines w0.025: -17.486,0 -2.5,0 ; -17.486,127 -2.5,127 ; -9.612,67.691 5.056,67.691 ; -9.612,71.755 1.627,71.755 ; 0,129.5 0,134.58 ; 58.317,62.611 73.62,62.611 ; 58.317,85.471 73.62,85.471 ; 60,129.5 60,134.58 ; 71.12,105.936 71.12,85.471 ; -14.986,0 -14.986,66.04 -14.986,127 ; -14.986,0 -14.361,4 -15.611,4 -14.986,0 ; -14.986,127 -15.611,123 -14.361,123 -14.986,127 ; -7.112,67.691 -7.112,69.088 -7.112,71.755 ; -7.112,67.691 -7.737,63.691 -6.487,63.691 -7.112,67.691 ; -7.112,71.755 -6.487,75.755 -7.737,75.755 -7.112,71.755 ; 0,132.08 30.48,132.08 60,132.08 ; 0,132.08 4,131.455 4,132.705 0,132.08 ; 60,132.08 56,132.705 56,131.455 60,132.08 ; 71.12,62.611 71.12,85.471 ; 71.12,62.611 71.745,66.611 70.495,66.611 71.12,62.611 ; 71.12,62.611 71.12,85.471 ; 71.12,85.471 70.495,81.471 71.745,81.471 71.12,85.471
  text "60" at 28.727,133.286 h2.16
  text "22.86" at 69.913,95.122 h2.16 r90
  text "4.06" at -8.319,65.481 h2.16 r90
  text "127" at -16.192,63.36 h2.16 r90
  text "FAB DARWING & DRILL LEGEND" at 55.01,-49.33 h1.42
PLACE_BOUND_TOP:
  region: 8.135,118.491 8.106,118.79 8.019,119.077 7.877,119.342 7.687,119.574 7.455,119.764 7.19,119.906 6.903,119.993 6.604,120.022 6.305,119.993 6.018,119.906 5.842,119.812 5.753,119.764 5.521,119.574 5.331,119.342 5.189,119.077 5.102,118.79 5.073,118.491 5.102,118.192 5.189,117.905 5.331,117.64 5.521,117.408 5.753,117.218 5.842,117.17 6.018,117.076 6.305,116.989 6.604,116.96 6.903,116.989 7.19,117.076 7.455,117.218 7.687,117.408 7.877,117.64 8.019,117.905 8.106,118.192 8.135,118.491
  region: 55.887,118.11 55.858,118.409 55.771,118.696 55.629,118.961 55.439,119.193 55.207,119.383 54.942,119.525 54.655,119.612 54.356,119.641 54.057,119.612 53.77,119.525 53.594,119.431 53.505,119.383 53.273,119.193 53.083,118.961 52.941,118.696 52.854,118.409 52.825,118.11 52.854,117.811 52.941,117.524 53.083,117.259 53.273,117.027 53.505,116.837 53.594,116.789 53.77,116.695 54.057,116.608 54.356,116.579 54.655,116.608 54.942,116.695 55.207,116.837 55.439,117.027 55.629,117.259 55.771,117.524 55.858,117.811 55.887,118.11
  region: 56.141,9.271 56.112,9.57 56.025,9.857 55.883,10.122 55.693,10.354 55.461,10.544 55.196,10.686 54.909,10.773 54.61,10.802 54.311,10.773 54.024,10.686 53.848,10.592 53.759,10.544 53.527,10.354 53.337,10.122 53.195,9.857 53.108,9.57 53.079,9.271 53.108,8.972 53.195,8.685 53.337,8.42 53.527,8.188 53.759,7.998 53.848,7.95 54.024,7.856 54.311,7.769 54.61,7.74 54.909,7.769 55.196,7.856 55.461,7.998 55.693,8.188 55.883,8.42 56.025,8.685 56.112,8.972 56.141,9.271
PLACE_BOUND_BOTTOM:
  region: 8.135,118.491 8.106,118.79 8.019,119.077 7.877,119.342 7.687,119.574 7.455,119.764 7.19,119.906 6.903,119.993 6.604,120.022 6.305,119.993 6.018,119.906 5.842,119.812 5.753,119.764 5.521,119.574 5.331,119.342 5.189,119.077 5.102,118.79 5.073,118.491 5.102,118.192 5.189,117.905 5.331,117.64 5.521,117.408 5.753,117.218 5.842,117.17 6.018,117.076 6.305,116.989 6.604,116.96 6.903,116.989 7.19,117.076 7.455,117.218 7.687,117.408 7.877,117.64 8.019,117.905 8.106,118.192 8.135,118.491
  region: 55.887,118.11 55.858,118.409 55.771,118.696 55.629,118.961 55.439,119.193 55.207,119.383 54.942,119.525 54.655,119.612 54.356,119.641 54.057,119.612 53.77,119.525 53.594,119.431 53.505,119.383 53.273,119.193 53.083,118.961 52.941,118.696 52.854,118.409 52.825,118.11 52.854,117.811 52.941,117.524 53.083,117.259 53.273,117.027 53.505,116.837 53.594,116.789 53.77,116.695 54.057,116.608 54.356,116.579 54.655,116.608 54.942,116.695 55.207,116.837 55.439,117.027 55.629,117.259 55.771,117.524 55.858,117.811 55.887,118.11
  region: 56.141,9.271 56.112,9.57 56.025,9.857 55.883,10.122 55.693,10.354 55.461,10.544 55.196,10.686 54.909,10.773 54.61,10.802 54.311,10.773 54.024,10.686 53.848,10.592 53.759,10.544 53.527,10.354 53.337,10.122 53.195,9.857 53.108,9.57 53.079,9.271 53.108,8.972 53.195,8.685 53.337,8.42 53.527,8.188 53.759,7.998 53.848,7.95 54.024,7.856 54.311,7.769 54.61,7.74 54.909,7.769 55.196,7.856 55.461,7.998 55.693,8.188 55.883,8.42 56.025,8.685 56.112,8.972 56.141,9.271
ASSEMBLY_TOP:
  text "TOP ASSEMBLY" at 55.499,-49.276 h1.52
  text ".GTO" at 97.43,-49.36 h1.52
ASSEMBLY_BOTTOM:
  text "ASSEMBLY (SECONDARY)" at 31.115,-49.276 h1.52
TOP_TITLE_BLOCK:
  circle w0.254: c133.432,-56.1 r1.3
  region: 118.954,-57.193 108.198,-57.193 109.191,-54.7 117.049,-54.7 117.498,-53.941 119.706,-56.489
  region: 132.957,-48.863 117.43,-48.863 116.736,-50.639 115.525,-51.864 114.128,-50.004 114.128,-48.353 115.271,-46.956 116.707,-46.577 132.957,-46.577
  lines w0.254: 109.191,-54.7 117.983,-54.7 114.917,-51.162 cw(c116.721,-49.218) 116.961,-46.577 133.725,-46.577 132.963,-48.863 ; 112.505,-46.33 cw(c114.931,-47.301) 115.168,-44.698 ; 112.544,-46.298 108.198,-57.193 127.52,-57.193 ccw(c127.769,-54.458) 130.318,-55.478 ; 114.284,-50.233 119.706,-56.489 ; 114.538,-50.233 119.843,-56.354 ; 114.538,-49.979 119.843,-56.1 ; 114.636,-48.863 127.629,-48.863 ; 114.665,-49.852 119.97,-55.973 ; 114.792,-49.725 120.097,-55.846 ; 114.919,-49.598 120.224,-55.719 ; 115.046,-49.471 120.351,-55.592 ; 115.101,-47.518 120.406,-53.639 ; 115.169,-44.698 134.619,-44.698 130.319,-55.476 ; 115.173,-49.344 120.423,-55.402 ; 115.173,-49.09 120.478,-55.211 ; 115.173,-48.836 120.478,-54.957 ; 115.173,-47.947 120.478,-54.068 ; 115.3,-48.709 120.605,-54.83 ; 115.3,-48.328 120.605,-54.449 ; 116.672,-54.713 ccw(c116.777,-54.178) 117.074,-53.721 ; 117.758,-48.85 ccw(c117.732,-49.417) 117.402,-49.879 119.767,-52.608 cw(c117.963,-54.552) 118.695,-57.101 ; 124.039,-56.989 126.929,-48.609 ; 124.262,-56.939 127.131,-48.618 ; 124.389,-56.939 127.258,-48.618 ; 124.643,-56.939 127.512,-48.618 ; 124.897,-56.939 127.766,-48.618 ; 125.151,-56.939 128.02,-48.618 ; 125.405,-56.939 128.274,-48.618 ; 125.659,-56.939 128.528,-48.618 ; 125.913,-56.939 128.782,-48.618 ; 126.167,-56.939 129.036,-48.618 ; 126.375,-56.989 129.265,-48.609 ; 129.265,-48.863 132.957,-48.863 ; 132.289,-48.861 133.051,-46.575 ; 132.455,-48.863 133.217,-46.577 ; 132.709,-48.863 133.471,-46.577
  lines w0.3: 46.427,-56.079 106.427,-56.079 ; 46.427,-51.079 106.427,-51.079 ; 46.427,-46.079 106.427,-46.079 ; 86.427,-61.079 86.427,-46.079 ; 106.427,-61.079 106.427,-41.079 ; 124.039,-56.989 126.375,-56.989 ; 46.427,-61.079 136.427,-61.079 136.427,-41.079 46.427,-41.079 46.428,-61.079
  text "Project: '.Board_Name'" at 47.428,-44.295 h3
  text "Layer:" at 47.428,-49.379 h3
  text "Gerber:" at 87.416,-49.379 h3
  text "Variant: '.VariantName'" at 47.428,-54.379 h3
  text "Ref: '.Board_Reference'" at 87.543,-54.379 h3
  text "R" at 132.924,-56.862 h1.52
  text "Date: '.Board_Document_Date'" at 47.428,-59.379 h3
  text "Rev: '.Board_PCB_Revision'" at 87.486,-59.379 h3
BOTTOM_TITLE_BLOCK:
  circle w0.254: c-43.658,-56.426 r1.3
  region: -29.18,-57.519 -18.424,-57.519 -19.417,-55.026 -27.275,-55.026 -27.724,-54.267 -29.932,-56.815
  region: -43.183,-49.189 -27.656,-49.189 -26.962,-50.965 -25.751,-52.19 -24.354,-50.33 -24.354,-48.679 -25.497,-47.282 -26.933,-46.903 -43.183,-46.903
  lines w0.254: -43.697,-46.903 -42.935,-49.189 ; -43.443,-46.903 -42.681,-49.189 ; -43.277,-46.901 -42.515,-49.187 ; -43.189,-49.189 -43.951,-46.903 -27.187,-46.903 cw(c-26.947,-49.544) -25.143,-51.488 -28.209,-55.026 -19.417,-55.026 ; -43.183,-49.189 -39.491,-49.189 ; -40.546,-55.802 -44.845,-45.024 -25.395,-45.024 ; -40.545,-55.804 ccw(c-37.995,-54.784) -37.747,-57.519 -18.424,-57.519 -22.77,-46.624 ; -39.491,-48.935 -36.602,-57.315 ; -39.262,-48.944 -36.393,-57.265 ; -39.008,-48.944 -36.139,-57.265 ; -38.754,-48.944 -35.885,-57.265 ; -38.5,-48.944 -35.631,-57.265 ; -38.246,-48.944 -35.377,-57.265 ; -37.992,-48.944 -35.123,-57.265 ; -37.855,-49.189 -24.862,-49.189 ; -37.738,-48.944 -34.869,-57.265 ; -37.484,-48.944 -34.615,-57.265 ; -37.357,-48.944 -34.488,-57.265 ; -37.155,-48.935 -34.266,-57.315 ; -30.831,-55.156 -25.526,-49.034 ; -30.831,-54.775 -25.526,-48.653 ; -30.704,-55.537 -25.399,-49.415 ; -30.704,-55.283 -25.399,-49.161 ; -30.704,-54.394 -25.399,-48.272 ; -30.65,-55.728 -25.399,-49.669 ; -30.632,-53.965 -25.327,-47.844 ; -30.577,-55.918 -25.272,-49.796 ; -30.45,-56.045 -25.145,-49.923 ; -30.323,-56.172 -25.018,-50.05 ; -30.196,-56.299 -24.891,-50.177 ; -30.069,-56.68 -24.764,-50.558 ; -30.069,-56.426 -24.764,-50.304 ; -29.932,-56.815 -24.51,-50.558 ; -28.922,-57.427 cw(c-28.189,-54.878) -29.993,-52.934 -27.628,-50.205 ccw(c-27.958,-49.743) -27.984,-49.176 ; -27.301,-54.047 ccw(c-27.003,-54.504) -26.898,-55.039 ; -25.394,-45.024 cw(c-25.157,-47.627) -22.731,-46.656
  lines w0.3: -36.602,-57.315 -34.266,-57.315 ; -16.841,-61.405 -16.841,-41.405 ; -16.841,-56.405 43.159,-56.405 ; -16.841,-51.405 43.159,-51.405 ; -16.841,-46.405 43.159,-46.405 ; 3.159,-61.405 3.159,-46.405 ; -46.841,-61.405 43.159,-61.405 43.159,-41.405 -46.841,-41.405 -46.841,-61.405
  text "Project: '.Board_Name'" at 41.965,-44.621 h3
  text "Gerber:" at 1.976,-49.705 h3
  text "Layer:" at 41.965,-49.705 h3
  text "Ref: '.Board_Reference'" at 1.976,-54.705 h3
  text "Variant: '.VariantName'" at 41.965,-54.705 h3
  text "R" at -43.15,-57.188 h1.52
  text "Rev: '.Board_PCB_Revision'" at 2.033,-59.705 h3
  text "Date: '.Board_Document_Date'" at 41.965,-59.705 h3
REVISION_BLOCK:
  lines w0.025: 345.186,244.094 345.186,275.844 345.186,244.094 ; 345.186,249.174 450.596,249.174 345.186,249.174 ; 345.186,254.254 450.596,254.254 345.186,254.254 ; 345.186,259.334 450.596,259.334 345.186,259.334 ; 345.186,264.414 450.596,264.414 345.186,264.414 ; 345.186,269.494 450.596,269.494 345.186,269.494 ; 355.346,244.094 355.346,269.494 355.346,244.094 ; 411.226,244.094 411.226,269.494 411.226,244.094 ; 430.276,244.094 430.276,269.494 430.276,244.094
REVISION_DATA:
  lines w0.025: 29.21,51.13 43.155,51.13 43.155,59.944 29.21,59.944 29.21,51.13 ; 29.87,20.472 43.028,20.472 43.028,33.63 29.87,33.63 29.87,20.472
  text "REVISIONS" at 384.556,272.034 h2.16
  text "REVISIONS" at 384.556,272.034 h2.16
  text "REV" at 347.726,265.684 h1.91
  text "REV" at 347.726,265.684 h1.91
  text "DESCRIPTION" at 361.696,265.684 h1.91
  text "DESCRIPTION" at 361.696,265.684 h1.91
  text "DATE" at 416.306,265.684 h1.91
  text "DATE" at 416.306,265.684 h1.91
  text "APPROVED" at 434.086,265.684 h1.91
  text "APPROVED" at 434.086,265.684 h1.91
  text "1.0" at 347.726,260.604 h1.91
  text "1.0" at 347.726,260.604 h1.91
  text "EDITION ORIGINALE" at 361.696,260.604 h1.91
  text "EDITION ORIGINALE" at 361.696,260.604 h1.91
  text "2008-**-**" at 412.496,260.604 h1.91
  text "2008-**-**" at 412.496,260.604 h1.91
  text "***" at 438.15,260.604 h1.91
  text "***" at 438.15,260.604 h1.91
PIN_NUMBER:
NCLEGEND-1-6:
  lines w0.025: 100.101,102.425 100.305,102.425 ; 100.203,102.324 100.203,102.527 ; 96.959,81.597 97.909,79.304 100.203,78.353 102.497,79.304 103.447,81.597 102.497,83.891 100.203,84.842 97.909,83.891 96.959,81.597 ; 99.695,86.55 100.203,86.296 100.711,86.55 100.711,87.058 100.203,87.312 99.695,87.058 99.695,86.55 ; 99.708,70.688 100.203,71.679 100.698,70.688 99.708,70.688 ; 99.847,76.391 100.203,76.746 100.559,76.391 100.203,76.035 99.847,76.391 ; 99.873,49.517 ccw(c99.873,50.355) 99.873,51.194 100.533,51.194 ccw(c100.533,50.355) 100.533,49.517 99.873,49.517 ; 100.051,92.011 100.127,91.859 100.279,91.859 100.355,92.011 100.279,92.164 100.127,92.164 100.051,92.011 ; 100.076,97.091 100.33,97.091 100.33,97.346 100.076,97.346 100.076,97.091 ; 100.165,54.8 ccw(c100.165,55.562) 100.165,56.325 100.241,56.325 ccw(c100.241,55.562) 100.241,54.8 100.165,54.8 ; 100.203,58.763 cw(c100.203,60.77) 100.203,62.776 cw(c100.203,60.77) 100.203,58.763 ; 100.203,64.783 cw(c100.203,65.977) 100.203,67.17 cw(c100.203,65.977) 100.203,64.783
  lines w0.152: 94.615,52.959 186.868,52.959 ; 94.615,58.166 186.868,58.166 ; 94.615,63.373 186.868,63.373 ; 94.615,68.58 186.868,68.58 ; 94.615,73.787 186.868,73.787 ; 94.615,78.994 186.868,78.994 ; 94.615,84.201 186.868,84.201 ; 94.615,89.408 186.868,89.408 ; 94.615,94.615 186.868,94.615 ; 94.615,99.822 186.868,99.822 ; 94.615,105.029 186.868,105.029 ; 94.615,110.236 186.868,110.236 ; 94.615,115.443 186.868,115.443 ; 105.791,47.752 105.791,110.236 ; 121.691,47.752 121.691,110.236 ; 145.466,47.752 145.466,110.236 ; 162.941,47.752 162.941,110.236 ; 177.267,47.752 177.267,110.236 ; 94.615,47.752 94.615,121.793 186.868,121.793 186.868,47.752 94.615,47.752
  text "DRILL CHART: TOP to BOTTOM" at 120.929,118.935 h1.91
  text "ALL UNITS ARE IN MILS" at 124.739,112.585 h1.91
  text "FIGURE" at 95.631,107.379 h1.91
  text "SIZE" at 110.693,107.379 h1.91
  text "TOLERANCE" at 126.721,107.379 h1.91
  text "PLATED" at 149.631,107.379 h1.91
  text "ROTATION" at 164.008,107.379 h1.91
  text "QTY" at 179.781,107.379 h1.91
  text "8.0" at 111.455,101.473 h1.91
  text "+3.0/-3.0" at 126.721,101.473 h1.91
  text "PLATED" at 149.631,101.473 h1.91
  text "-" at 169.342,101.473 h1.91
  text "243" at 179.781,101.473 h1.91
  text "10.0" at 110.693,96.266 h1.91
  text "+3.0/-3.0" at 126.721,96.266 h1.91
  text "PLATED" at 149.631,96.266 h1.91
  text "-" at 169.342,96.266 h1.91
  text "247" at 179.781,96.266 h1.91
  text "12.0" at 110.693,91.059 h1.91
  text "+3.0/-3.0" at 126.721,91.059 h1.91
  text "PLATED" at 149.631,91.059 h1.91
  text "-" at 169.342,91.059 h1.91
  text "321" at 179.781,91.059 h1.91
  text "40.0" at 110.693,85.852 h1.91
  text "+3.0/-3.0" at 126.721,85.852 h1.91
  text "PLATED" at 149.631,85.852 h1.91
  text "-" at 169.342,85.852 h1.91
  text "5" at 181.305,85.852 h1.91
  text "118.0" at 109.931,80.645 h1.91
  text "+3.0/-3.0" at 126.721,80.645 h1.91
  text "PLATED" at 149.631,80.645 h1.91
  text "-" at 169.342,80.645 h1.91
  text "4" at 181.305,80.645 h1.91
  text "28.0" at 110.693,75.438 h1.91
  text "+2.0/-2.0" at 126.721,75.438 h1.91
  text "NON-PLATED" at 146.583,75.438 h1.91
  text "-" at 169.342,75.438 h1.91
  text "2" at 181.305,75.438 h1.91
  text "39.0" at 110.693,70.231 h1.91
  text "+2.0/-2.0" at 126.721,70.231 h1.91
  text "NON-PLATED" at 146.583,70.231 h1.91
  text "-" at 169.342,70.231 h1.91
  text "2" at 181.305,70.231 h1.91
  text "47.0" at 110.693,65.024 h1.91
  text "+2.0/-2.0" at 126.721,65.024 h1.91
  text "NON-PLATED" at 146.583,65.024 h1.91
  text "-" at 169.342,65.024 h1.91
  text "2" at 181.305,65.024 h1.91
  text "79.0" at 110.693,59.817 h1.91
  text "+2.0/-2.0" at 126.721,59.817 h1.91
  text "NON-PLATED" at 146.583,59.817 h1.91
  text "-" at 169.342,59.817 h1.91
  text "2" at 181.305,59.817 h1.91
  text "33.0x30.0" at 106.883,54.61 h1.91
  text "+5.0/-5.0" at 126.721,54.61 h1.91
  text "PLATED" at 149.631,54.61 h1.91
  text "90.000" at 165.532,54.61 h1.91
  text "2" at 181.305,54.61 h1.91
  text "59.0x33.0" at 106.883,49.403 h1.91
  text "+5.0/-5.0" at 126.721,49.403 h1.91
  text "PLATED" at 149.631,49.403 h1.91
  text "90.000" at 165.532,49.403 h1.91
  text "2" at 181.305,49.403 h1.91
  text "TOTAL HOLES:" at 157.074,44.196 h1.91
  text "832" at 179.781,44.196 h1.91
FAB_NOTES:
  drawing of 602 lines, arcs and shapes, not listed
  text "5" at 15.24,232.664 h2.54
  text "5" at 15.24,232.664 h2.54
  text "IMPEDANCE TABLE" at 23.114,232.156 h2.54
  text "IMPEDANCE TABLE" at 23.114,232.156 h2.54
  text "LAYER" at 21.209,224.688 h1.91
  text "LAYER" at 21.209,224.688 h1.91
  text "TOLERANCE" at 116.459,224.688 h1.91
  text "TOLERANCE" at 116.459,224.688 h1.91
  text "TRACE" at 40.259,224.434 h1.91
  text "TRACE" at 40.259,224.434 h1.91
  text "SPACEING" at 54.229,224.434 h1.91
  text "SPACEING" at 54.229,224.434 h1.91
  text "IMPEDANCE" at 73.279,224.434 h1.91
  text "IMPEDANCE" at 73.279,224.434 h1.91
  text "IMPEDANCE" at 96.139,224.434 h1.91
  text "IMPEDANCE" at 96.139,224.434 h1.91
  text "(mil)" at 41.529,222.148 h1.27
  text "(mil)" at 41.529,222.148 h1.27
  text "(Single end)" at 74.549,222.148 h1.27
  text "(Single end)" at 74.549,222.148 h1.27
  text "(mil)" at 56.769,221.894 h1.27
  text "(mil)" at 56.769,221.894 h1.27
  text "(Differential)" at 96.139,221.894 h1.27
  text "(Differential)" at 96.139,221.894 h1.27
  text "4" at 175.768,218.694 h1.91
  text "LAYER STUCK-UP" at 180.848,218.694 h1.91
  text "1,6" at 21.082,218.44 h1.91
  text "1,6" at 21.082,218.44 h1.91
  text "5.0" at 41.402,218.186 h1.91
  text "5.0" at 41.402,218.186 h1.91
  text "N/A" at 58.039,216.814 h1.91
  text "N/A" at 58.039,216.814 h1.91
  text "55 OHM" at 74.549,216.56 h1.91
  text "55 OHM" at 74.549,216.56 h1.91
  text "N/A" at 99.949,216.56 h1.91
  text "N/A" at 99.949,216.56 h1.91
  text "+/-10%" at 118.999,216.56 h1.91
  text "+/-10%" at 118.999,216.56 h1.91
  text "4.0" at 41.148,215.138 h1.91
  text "4.0" at 41.148,215.138 h1.91
  text "4" at 21.082,214.884 h1.91
  text "4" at 21.082,214.884 h1.91
  text "SOLDERMASK & SILKSCREEN" at 225.552,212.598 h1.52
  text "N/A" at 77.216,210.566 h1.91
  text "5.1" at 41.021,210.439 h1.91
  text "9.9" at 57.531,210.439 h1.91
  text "100 OHM" at 97.79,210.312 h1.91
  text "+/-10%" at 118.999,210.21 h1.91
  text "+/-10%" at 118.999,210.21 h1.91
  text "1,6" at 21.082,210.185 h1.91
  text "TOP     (0.5 oz cu+planted)" at 225.552,209.55 h1.52
  text "PREPREG  3.9 mil" at 192.024,205.359 h1.52
  text "90 OHM" at 97.638,204.064 h1.91
  text "+/-10%" at 119.151,204.013 h1.91
  text "6.1" at 40.894,203.835 h1.91
  text "8.9" at 57.404,203.708 h1.91
  text "N/A" at 77.343,203.479 h1.91
  text "1,6" at 21.209,203.327 h1.91
  text "LAYER 2 (1 oz)" at 225.552,201.93 h1.52
  text "CORE     4  mil" at 192.024,199.39 h1.52
  text "LAYER 3 (1 oz)" at 225.552,196.85 h1.52
  text "63 mil" at 169.875,195.008 h1.91
  text "PREPREG  ** mil" at 192.024,192.659 h1.52
  text "+/-10%" at 170.942,192.278 h1.27
  text "LAYER 4 (1 oz)" at 225.552,189.23 h1.52
  text "CORE     4  mil" at 192.024,186.69 h1.52
  text "LAYER 5 (1 oz)" at 225.552,184.15 h1.52
  text "PREPREG  3.9 mil" at 192.024,179.959 h1.52
  text "BOTTOM  (0.5 oz cu+planted)" at 225.552,176.53 h1.52
  text "SOLDERMASK & SILKSCREEN" at 225.552,173.482 h1.52
  text "6 LAYER STACKING" at 190.5,168.91 h1.91
  text "PCB SPECIFICATIONS:" at 267.64,137.693 h2.16
  text "A. MATERIAL;" at 267.64,132.613 h2.16
  text "FR-4," at 312.09,132.613 h2.16
  text "TG-170" at 336.22,132.613 h2.16
  text "TG-150" at 355.27,132.613 h2.16
  text "TG-140" at 376.86,132.613 h2.16
  text "B. MATERIAL FAMILY;" at 267.64,127.533 h2.16
  text "N/A." at 312.09,127.533 h2.16
  text "C. SOLDERMASK COLOR;" at 267.64,122.453 h2.16
  text "GREEN" at 315.9,122.453 h2.16
  text "BLUE" at 334.95,122.453 h2.16
  text "RED" at 356.54,122.453 h2.16
  text "BLACK" at 378.13,122.453 h2.16
  text "D. SILKSCREEN COLOR;" at 267.64,117.373 h2.16
  text "WHITE" at 315.9,117.373 h2.16
  text "YELLOW" at 334.95,117.373 h2.16
  text "BLACK" at 356.54,117.373 h2.16
  text "E. SURFACE FINISH;" at 267.64,112.293 h2.16
  text "ENIG" at 315.9,112.293 h2.16
  text "IMMERSION SILVER" at 334.95,112.293 h2.16
  text "IMMERSION TIN" at 378.13,112.293 h2.16
  text "HASL" at 315.9,107.213 h2.16
  text "HASL(PB-FREE)" at 334.95,107.213 h2.16
  text "GOLDEN FINGER" at 378.13,107.213 h2.16
  text "F. IMPEDANCE CONTROL;" at 267.64,102.133 h2.16
  text "NO" at 315.9,102.133 h2.16
  text "YES" at 334.95,102.133 h2.16
  text "(SEE IMPEDANCE TABLE FOR DETAIL INFORMATION)" at 340.03,102.133 h2.16
  text "G. THROUGH VIA;" at 267.64,97.053 h2.16
  text "PLUG THE VIAS WHICH ARE COVERED WITH SOLDERMASK ONE OR TWO SIDE." at 304.47,97.053 h2.16
  text "PLUG MATERIAL:" at 304.47,91.973 h2.16
  text "SOLDERMASK" at 345.11,91.973 h2.16
  text "NON-CONDUCTIVE EPOXY." at 378.13,91.973 h2.16
  text "H. STACK-UP;" at 267.64,86.893 h2.16
  text "SEE LAYER STACK-UP SEQUENCE FOR OVERALL THICKNESS." at 304.47,86.893 h2.16
  text "PCB REQUIREMENTS:" at 267.386,79.273 h2.16
  text "1. THIS BOARD WILL CONFORM TO:" at 266.116,74.193 h2.16
  text "IPC-A-600. CURRENT REV., CLASS II" at 266.116,70.383 h2.16
  text "IPC-6012, CURRENT REV., CLASS II" at 266.116,66.573 h2.16
  text "2. UNLESS OTHERWISE SPECIFIED ALL HOLE DIMENSIONS APPLY AFTER PLATING." at 266.116,61.239 h2.16
  text "ALL HOLES SHALL BE LOCATED WITHIN .003\" DIAMETER OF TRUE POSITION." at 266.116,57.429 h2.16
  text "3. PLATED HOLE WALL THICKNESS SHALL NOT BE LESS THAN .001 INCH MINIMUM" at 266.116,52.349 h2.16
  text "AVERAGE, WITH NO READING LESS THAN .0008 BY COROSS SECTION." at 270.688,48.793 h2.16
  text "4. MATERIAL FR4 RATING 94V-0 MINIMUM EPOXY GLASS LAMINATE." at 266.116,43.459 h2.16
  text "5. BOARD SHALL BE LPI SOLDER MASKED OVER BARE COPPER BOTH SIDES PER" at 266.116,38.887 h2.16
  text "IPC-SM-840 CLASS II." at 266.116,35.077 h2.16
  text "6. SILKSCREEN SHALL BE PERMANENT NON-CONDUCTIVE INK AND WITH NO OVERLAP" at 266.116,29.997 h2.16
  text "ON ANY COMPONENT PAD OR THROUGH HOLE." at 266.116,26.187 h2.16
  text "7. MFGR, TO LEGIBLY ETCH OR STAMP/SCREEN WITH PERMANENT NON-CONDUCTIVE INK" at 266.116,21.107 h2.16
  text "D. MFGR. LOGO" at 313.106,17.805 h2.16
  text "A. U.L. CODE" at 273.482,17.297 h2.16
  text "E. SUCCESSFUL ELECTRICAL BOARD TEST." at 313.106,14.249 h2.16
  text "B. DATE CODE" at 273.482,13.741 h2.16
  text "C. FLAMMABILITY RATING" at 273.482,10.185 h2.16
  text "8. REMOVE THE FLASHS WHICH SMALLER THAN HOLE SIZE." at 266.116,4.851 h2.16
  text "9. REMOVE ALL SHAPE EDGES AND BURRS .005 MAXIMUM." at 266.116,-0.229 h2.16
  text "10. PLEASE USE THE SUPPLIED IPC 356 NETLIST TO VERIFY BOARD BEFORE" at 266.116,-5.563 h2.16
  text "FABRICATING BOARD." at 266.116,-9.373 h2.16
LAY16:
  text "16" at 66.929,-45.466 h1.91
  text "LAYER 16(INTERNAL SIGNAL)" at 55.499,-49.276 h1.52
LAY4:
  text "4" at 68.199,-45.466 h1.91
  text "LAYER 4 (VTT PLANE)" at 55.499,-49.276 h1.52
LAY11:
  text "11" at 66.929,-45.466 h1.91
  text "LAYER 11(GND PLANE)" at 55.499,-49.276 h1.52
LAY5:
  text "5" at 68.199,-45.466 h1.91
  text "LAYER 5 (GND PLANE)" at 55.499,-49.276 h1.52
LAY8:
  text "8" at 68.199,-45.466 h1.91
  text "LAYER 8 (GND PLANE)" at 55.499,-49.276 h1.52
LAY17:
  text "17" at 66.929,-45.466 h1.91
  text "LAYER 17(GND PLANE)" at 55.499,-49.276 h1.52
LAY12:
  text "12" at 66.929,-45.466 h1.91
  text "LAYER 12(INTERNAL SIGNAL)" at 55.499,-49.276 h1.52
LAY3:
  text "3" at 68.199,-45.466 h1.91
  text "LAYER 3 (INTERNAL SIGNAL)" at 55.499,-49.276 h1.52
LAY6:
  text "6" at 68.199,-45.466 h1.91
  text "LAYER 6 (GND PLANE)" at 55.499,-49.276 h1.52
LAY14:
  text "14" at 66.929,-45.466 h1.91
  text "LAYER 14(INTERNAL SIGNAL)" at 55.499,-49.276 h1.52
ORIGIN:
  circle w0.025: c0,0 r2.54
  pour cut-out: 0,-2.54 0.221,-2.53 0.441,-2.501 0.657,-2.453 0.869,-2.387 1.073,-2.302 1.27,-2.2 1.457,-2.081 1.633,-1.946 1.796,-1.796 1.946,-1.633 2.081,-1.457 2.2,-1.27 2.302,-1.073 2.387,-0.869 2.453,-0.657 2.501,-0.441 2.53,-0.221 2.54,0 0,0 0,-2.54
  pour cut-out: 0,2.54 -0.221,2.53 -0.441,2.501 -0.657,2.453 -0.869,2.387 -1.073,2.302 -1.27,2.2 -1.457,2.081 -1.633,1.946 -1.796,1.796 -1.946,1.633 -2.081,1.457 -2.2,1.27 -2.302,1.073 -2.387,0.869 -2.453,0.657 -2.501,0.441 -2.53,0.221 -2.54,0 0,0 0,2.54
  lines w0.025: -3.81,0 3.81,0 ; 0,-3.81 0,3.81
LAY10:
  text "10" at 66.929,-45.466 h1.91
  text "LAYER 10(INTERNAL SIGNAL)" at 55.499,-49.276 h1.52
LAY15:
  text "15" at 66.929,-45.466 h1.91
  text "LAYER 15(GND PLANE)" at 55.499,-49.276 h1.52
LAYER_COUNT:
  text "/XX" at 66.929,-45.466 h1.91
DRAWING_ORIGIN:
  lines w0.025: -0.635,0 0.635,0 ; 0,-0.635 0,0.635
LAY7:
  text "7" at 68.199,-45.466 h1.91
  text "LAYER 7 (INTERNAL SIGNAL)" at 55.499,-49.276 h1.52
LAY2:
  lines w0.254: 15.113,58.547 15.113,59.944 16.51,59.944 16.51,58.547 15.113,58.547 ; 15.113,60.579 15.113,61.976 16.51,61.976 16.51,60.579 15.113,60.579
  text "2" at 68.199,-45.466 h1.91
  text "LAYER 2 (GND PLANE)" at 55.499,-49.276 h1.52
LAY9:
  text "9" at 68.199,-45.466 h1.91
  text "LAYER 9 (INTERNAL SIGNAL)" at 55.499,-49.276 h1.52
LAY13:
  text "13" at 66.929,-45.466 h1.91
  text "LAYER 13(GND PLANE)" at 55.499,-49.276 h1.52
MP_DRAWING:
  text "MUTI-PACK DRAWING" at 55.499,-49.276 h1.52

## Text inside footprints (layer, text, board x,y; h text height)
CN5: Bottom Overlay "10" at 8.509,95.377 h1.5 r270; Bottom Overlay "9" at 2.032,91.948 h1.5 r270; Bottom Overlay "2" at 9.144,74.041 h1.5 r270; PIN_NUMBER "8" at 7.394,89.535 h0.41 r270; PIN_NUMBER "9" at 3.965,92.075 h0.41 r270; PIN_NUMBER "10" at 7.231,94.615 h0.41 r270; PIN_NUMBER "6" at 7.394,84.455 h0.41 r270; PIN_NUMBER "1" at 3.965,71.755 h0.41 r270; PIN_NUMBER "7" at 3.965,86.995 h0.41 r270; PIN_NUMBER "2" at 7.394,74.295 h0.41 r270; PIN_NUMBER "3" at 3.965,76.835 h0.41 r270; PIN_NUMBER "4" at 7.394,79.375 h0.41 r270; PIN_NUMBER "5" at 3.965,81.915 h0.41 r270; ASSEMBLY_BOTTOM "SSW-110-22-x-S-VS" at -6.198,82.804 h0.76 r270; SFLIB_INFO "Sofer Lib Information" at 16.891,78.613 h0.64 r270; SFLIB_INFO "Ref PN: SSW-110-22-X-S-VS" at 15.621,79.375 h0.64 r270; SFLIB_INFO "Creat : Yuki" at 14.605,79.375 h0.64 r270; SFLIB_INFO "Date  : 2014-12-04" at 13.589,79.375 h0.64 r270; SFLIB_INFO "Rev   : A1" at 12.573,79.375 h0.64 r270; SFLIB_INFO "Remark: D031-014A1" at 11.557,79.375 h0.64 r270; LIB_UNEVALUATED "NO" at 4.623,83.058 h0.89 r270